# Altium PCB InclinometerPCB.PcbDoc
Units mm, origin at the board's own origin, x right, y up, seen from the top; angles counter-clockwise.
Board outline 73.32 x 51.32 mm, 2 copper layers (Top Layer, Bottom Layer), stack 1.586 mm thick; 64 components, 61 nets, 230 pads, 38 vias.
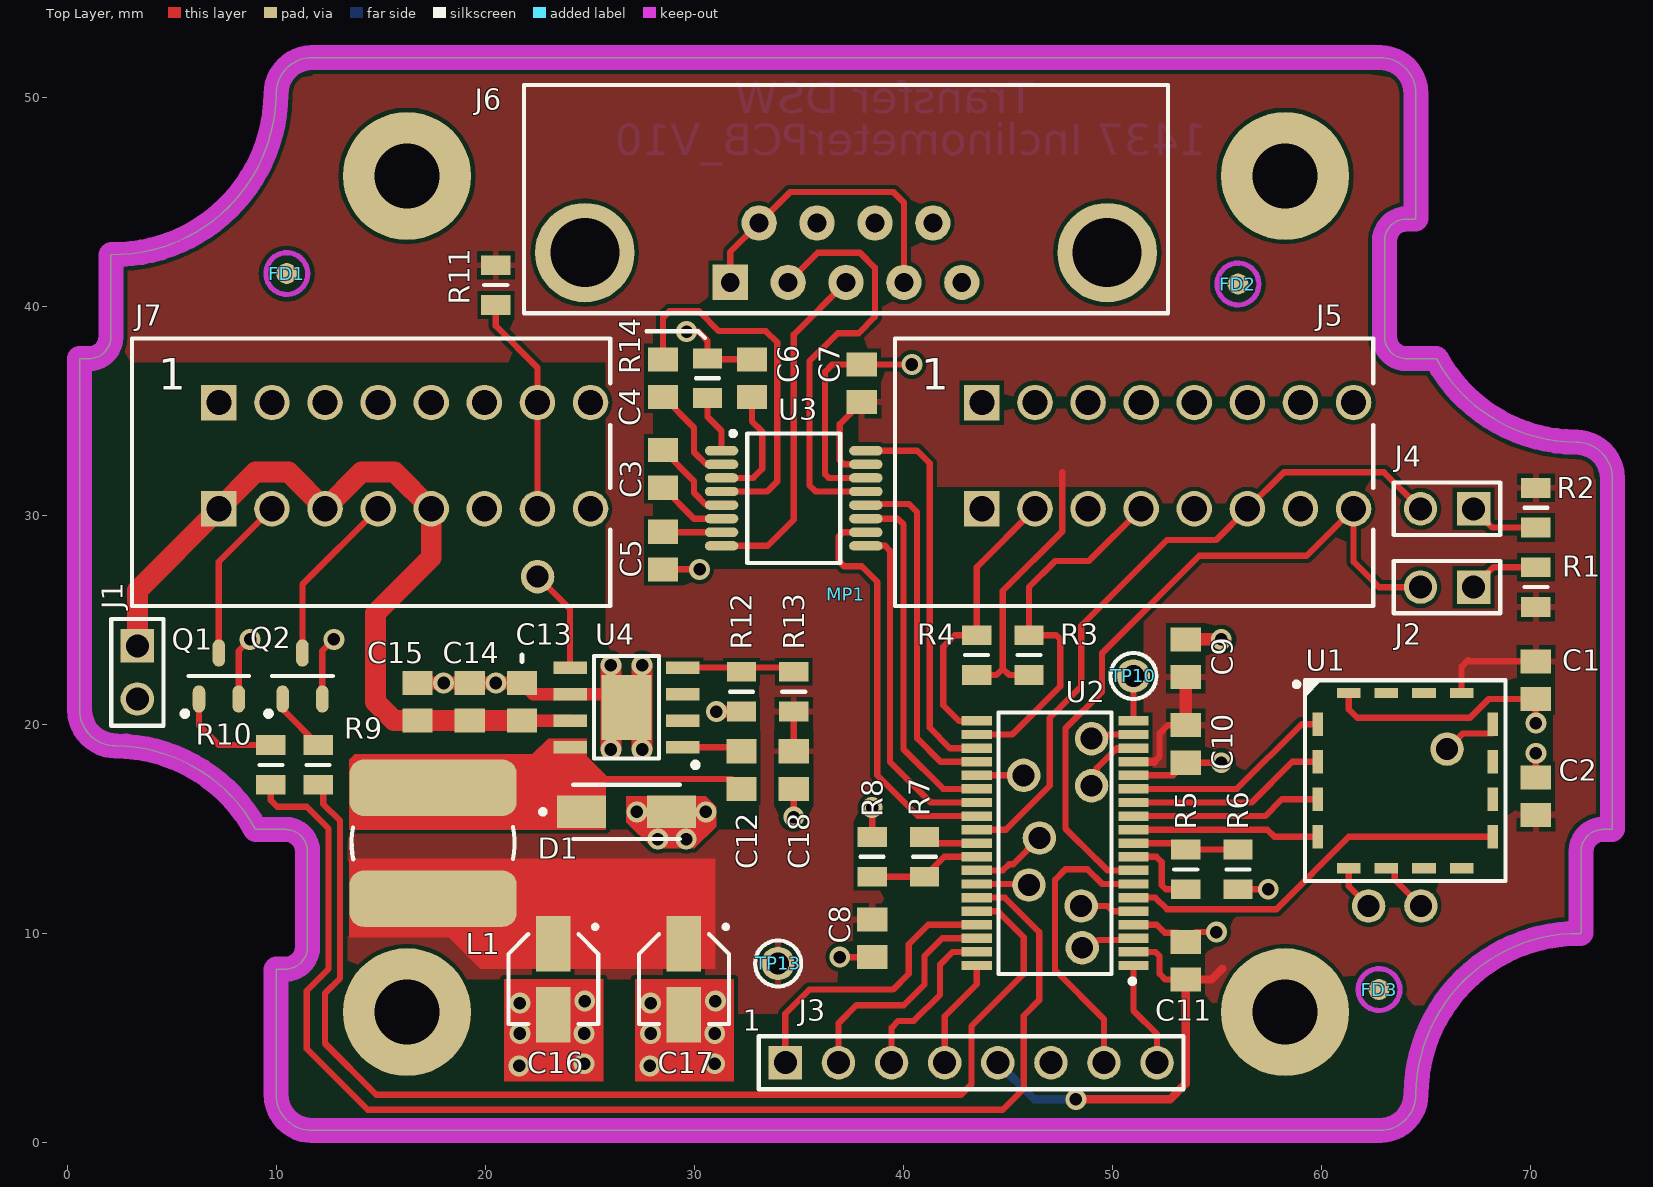
[diagram p0: Top Layer view]
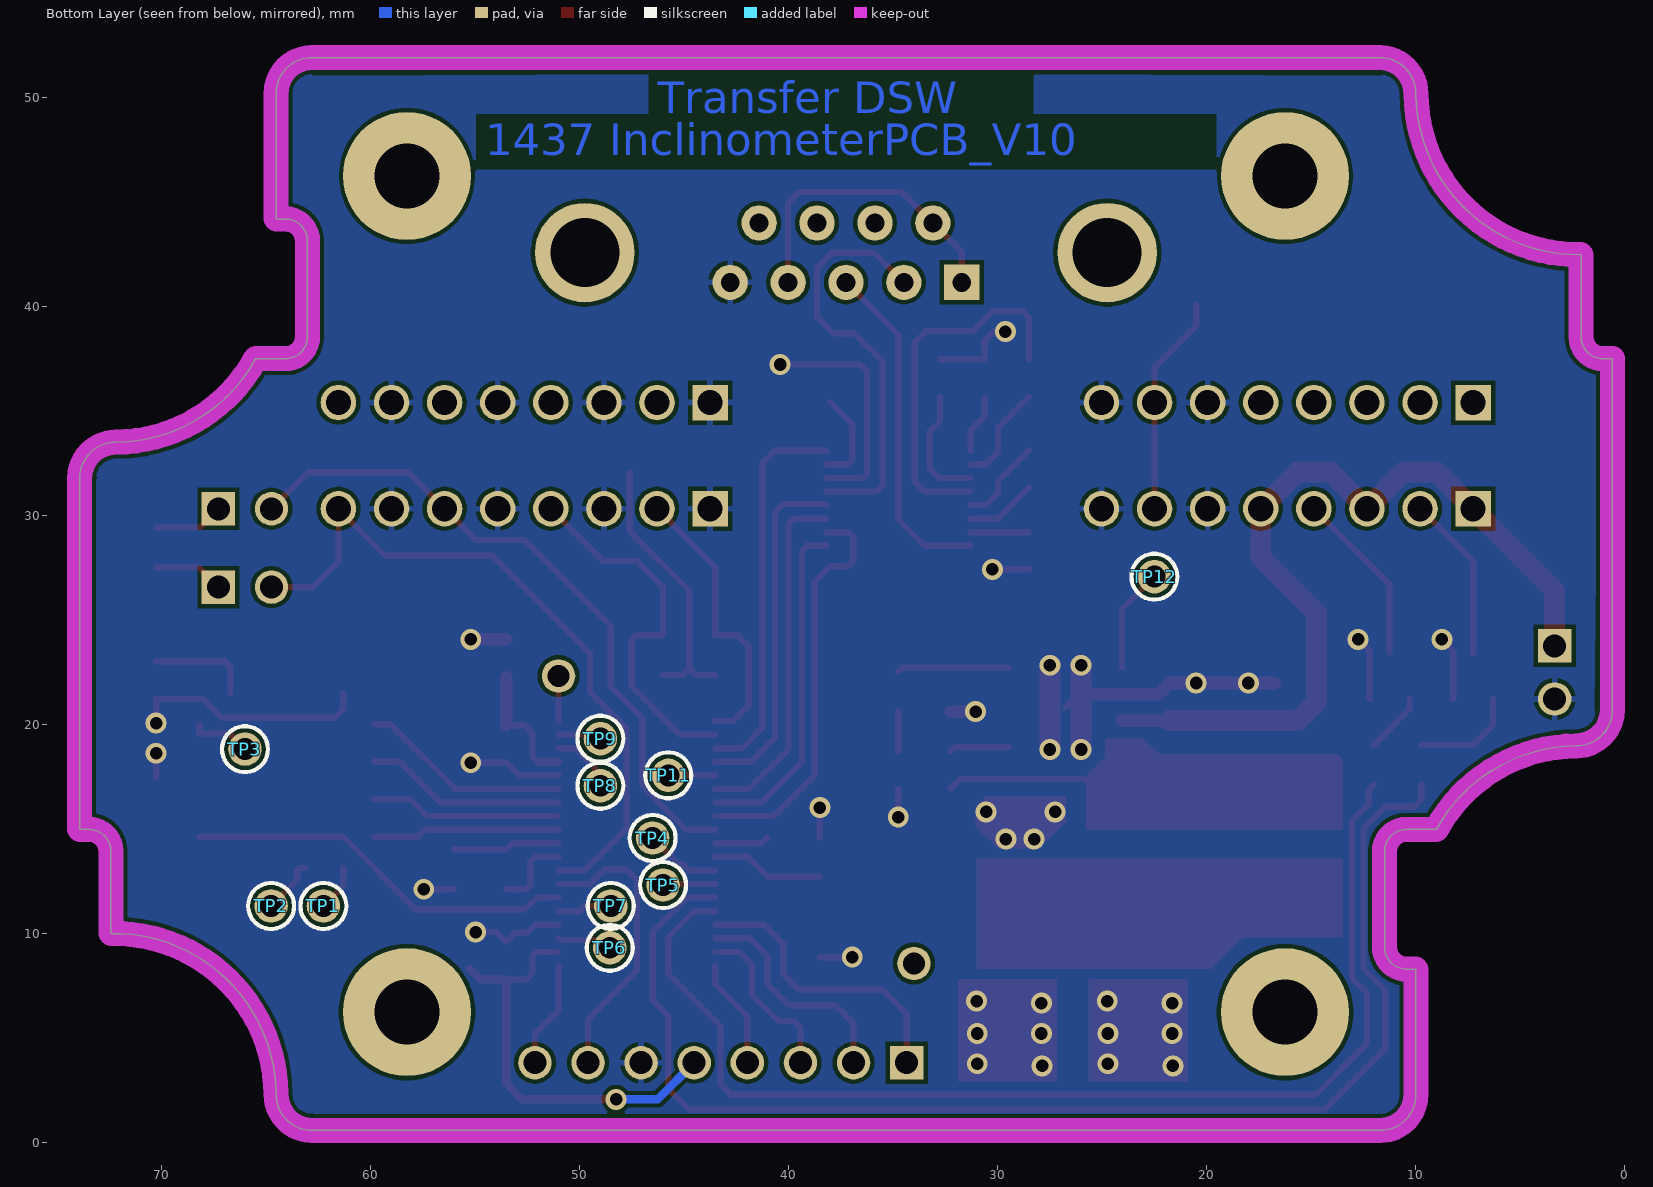
[diagram p1: Bottom Layer view, seen from below]
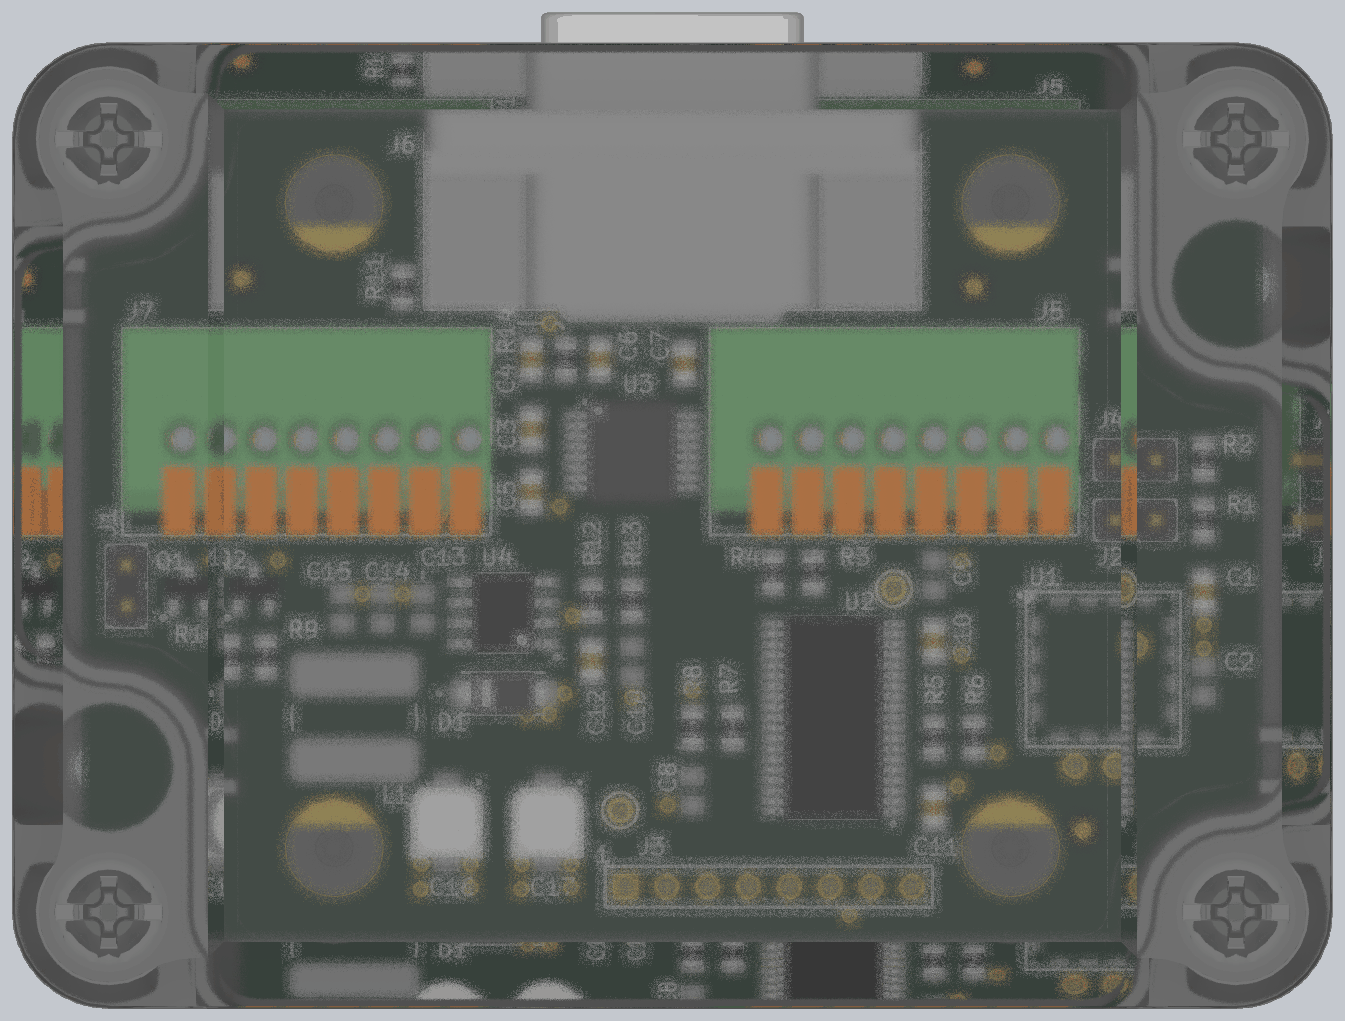
[diagram p2: 3D render of the assembled board from above, using the file's embedded part models]

## Layer stack, top to bottom
Top Solder: solder mask 0.0102, Solder Resist, Dk 3.5
Top Layer: signal copper 0.018
Dielectric1: core 1.55, FR-4, Dk 4.2
Bottom Layer: signal copper 0.018
Bottom Solder: solder mask 0.0102, Solder Resist, Dk 3.5

## Board outline
9.99,2.302 9.99,8.26 cw(c10.04,8.26) 10.04,8.31 10.44,8.31 ccw(c10.44,9.36) 11.49,9.36 11.49,13.94 ccw(c10.44,13.94) 10.44,14.99 9.043,14.99 cw(c9.043,15.04) 8.999,15.016 ccw(c2.261,11.285) 2.335,18.987 ccw(c2.32,20.717) 2.336,18.987 2.335,18.987 ccw(c2.261,11.285) 2.335,18.987 cw(c2.32,20.717) 0.59,20.701 cw(c0.64,20.702) 0.59,20.702 0.59,37.46 cw(c0.64,37.46) 0.64,37.51 1.04,37.51 ccw(c1.04,38.56) 2.09,38.56 2.09,42.438 cw(c2.14,42.438) 2.141,42.488 ccw(c2.226,50.249) 9.987,50.164 ccw(c2.226,50.249) 9.987,50.165 9.987,50.164 ccw(c11.717,50.18) 9.987,50.164 cw(c11.717,50.18) 11.701,51.91 cw(c11.702,51.86) 11.702,51.91 62.798,51.91 cw(c62.798,51.86) 62.799,51.91 cw(c62.798,50.198) 64.51,50.198 64.51,44.24 cw(c64.46,44.24) 64.46,44.19 64.06,44.19 ccw(c64.06,43.14) 63.01,43.14 63.01,38.56 ccw(c64.06,38.56) 64.06,37.51 65.457,37.51 cw(c65.457,37.46) 65.501,37.484 cw(c72.239,41.215) 65.501,37.484 ccw(c72.239,41.215) 72.165,33.513 ccw(c72.239,41.215) 72.165,33.513 ccw(c72.18,31.783) 72.164,33.513 72.165,33.513 cw(c72.18,31.783) 73.91,31.799 cw(c73.86,31.798) 73.91,31.798 73.91,15.04 cw(c73.86,15.04) 73.86,14.99 73.46,14.99 ccw(c73.46,13.94) 72.41,13.94 72.41,10.062 cw(c72.36,10.062) 72.359,10.012 ccw(c72.274,2.251) 64.513,2.336 ccw(c72.274,2.251) 64.513,2.335 64.513,2.336 cw(c62.783,2.32) 64.514,2.32 cw(c62.783,2.32) 62.799,0.59 cw(c62.798,0.64) 62.798,0.59 11.702,0.59 cw(c11.702,0.64) 11.701,0.59 cw(c11.702,2.302)

## Design rules (kind name [scope] priority, off if disabled: settings)
AcuteAngle [All] p1: minimum=8.00000000000000E+0001 checktracksonly=FALSE
Clearance Clearance_general [All] p1: gap=0.2 ignorepadtopadclearanceinfootprint=FALSE except(0: Arc-Hole Track-Hole SMDPad-Hole THPad-Hole Via-Hole Fill-Hole Poly-Hole Region-Hole Text-Hole)
Height [All] p1: minheight=0 maxheight=50 prefheight=12.7
HoleSize [All] p1: absolutevalues=TRUE maxlimit=5 minlimit=0.4 maxpercent=80.000 minpercent=20.000
MinimumAnnularRing [All] p1: minimumring=0.2
MinimumSolderMaskSliver [All] p1: minsoldermaskwidth=0.127
PlaneConnect PlaneConnect_VIAS [IsVia] p1: planeconnectstyle=Direct reliefexpansion=0.508 reliefentries=4 reliefconductorwidth=0.254 reliefairgap=0.254
PlaneConnect [All] p2: planeconnectstyle=Relief reliefexpansion=0.508 reliefentries=4 reliefconductorwidth=0.254 reliefairgap=0.254
PolygonConnect PolygonConnect_VIAS [IsVia] p1: connectstyle=Direct reliefconductorwidth=0.254 reliefentries=4 polygonreliefangle="90 Angle" airgapwidth=0.254
PolygonConnect [All] p2: connectstyle=Relief reliefconductorwidth=0.3 reliefentries=4 polygonreliefangle="90 Angle" airgapwidth=0.2
RoutingVias [All] p1: holewidth=0.6 width=1 viastyle="Through Hole" minholewidth=0.6 minwidth=1 maxholewidth=0.6 maxwidth=1
SMDNeckDown [All] p1: percent=100.000
SMDToCorner [All] p1: distance=39370
SilkToSilkClearance [All] p1: silktosilkclearance=0.2
SilkToSolderMaskClearance SilkscreenOverComponentPads [IsPad] p1: minsilkscreentomaskgap=0.2 clearancetoexposedcopper=TRUE
SolderMaskExpansion SolderMaskExpansion_via [isvia] p1: expansion=-0.2
SolderMaskExpansion [All] p2: expansion=0
Width Width_general [All] p1: maxlimit=2 minlimit=0.3 preferedwidth=0.3 checkconnectedcopper=TRUE // general nets rule
24 further rules are at their usual default settings.

## Components (designator, comment, footprint, x,y, rotation, side; value= is the part's Value field where it differs from the comment)
C1 "CAP" CAPC2012X88N 70.25,22.13 r90 top
C2 "CAP" CAPC2012X125N 70.25,16.58 r270 top
C3 "CAP" CAPC2012X88N 28.5,32.235 r270 top
C4 "CAP" CAPC2012X88N 28.5,36.58 r270 top
C5 "CAP" CAPC2012X88N 28.5,28.33 r90 top
C6 "CAP" CAPC2012X88N 32.75,36.58 r90 top
C7 "CAP" CAPC2012X88N 38,36.33 r270 top
C8 "CAP" CAPC2012X125N 38.5,9.78 r90 top
C9 "CAP" CAPC2012X125N 53.5,23.18 r270 top
C10 "CAP" CAPC2012X88N 53.5,19.08 r90 top
C11 "CAP" CAPC2012X88N 53.5,8.712 r270 top
C12 "CAP" CAPC2012X88N 32.25,17.83 r270 top
C13 "CAP" CAPC2012X125N 21.75,21.095 r270 top
C14 "CAP" CAPC2012X125N 19.25,21.095 r270 top
C15 "CAP" CAPC2012X125N 16.75,21.095 r270 top
C16 "CAP_POL" CAPAE430X560N 23.25,7.83 r270 top
C17 "CAP_POL" CAPAE430X560N 29.5,7.83 r270 top
C18 "CAP" CAPC2012X125N 34.75,17.83 r90 top
D1 "DIO_SCHOTTKY" DIOM5226X230N 26.75,15.83 r0 top
FD1 "MSC_FD" FID100X200 10.5,41.58 r0 top
FD2 "MSC_FD" FID100X200 56,41.08 r0 top
FD3 "MSC_FD" FID100X200 62.75,7.33 r0 top
J1 "CN_1X2M" HDRV2W64P254_1X2_508X254X854P 3.35,22.5 r270 top
J2 "CN_1X2M" HDRV2W64P254_1X2_508X254X854P 66,26.58 r180 top
J3 "CN_1X8M" "CN_WURTH_613 00811121" 34.35,3.83 r0 top
J4 "CN_1X2M" HDRV2W64P254_1X2_508X254X854P 66,30.33 r180 top
J5 "CN_1X8F" CN_WURTH_691403900008 43.75,30.33 r0 top
J6 "CN_1X9F" DB_RA_R-9 31.71,41.16 r180 top
J7 "CN_1X8F" CN_WURTH_691403900008 7.25,30.33 r0 top
L1 "IND_CORE" IND_BOURNS_SDR0805 17.5,14.33 r270 top
MP1 "MCH_MECHGENERIC" MCH_BOPLA_EM207 37.25,26.25 r270 top locked
Q1 "TRS_FETN_123" SOT95P237X112-3N 7.25,22.33 r90 top
Q2 "TRS_FETN_123" SOT95P237X112-3N 11.25,22.33 r90 top
R1 "RES" RESC2012X60N 70.25,26.58 r90 top
R2 "RES" RESC2012X60N 70.25,30.38 r270 top
R3 "RES" RESC2012X60N 46,23.33 r90 top
R4 "RES" RESC2012X60N 43.5,23.33 r90 top
R5 "RES" RESC2012X60N 53.5,13.08 r90 top
R6 "RES" RESC2012X60N 56,13.08 r270 top
R7 "RES" RESC2012X60N 41,13.68 r270 top
R8 "RES" RESC2012X60N 38.5,13.68 r90 top
R9 "RES" RESC2012X60N 12,18.08 r270 top
R10 "RES" RESC2012X60N 9.738,18.08 r270 top
R11 "RES" RESC2012X60N 20.5,41.03 r270 top
R12 "RES" RESC2012X60N 32.25,21.58 r270 top
R13 "RES" RESC2012X60N 34.75,21.58 r90 top
R14 "RES" RESC2012X60N 30.625,36.575 r90 top
TP1 "MSC_TP" MSC_TP_THT1MM 62.25,11.33 r180 bottom
TP2 "MSC_TP" MSC_TP_THT1MM 64.75,11.33 r180 bottom
TP3 "MSC_TP" MSC_TP_THT1MM 66,18.83 r180 bottom
TP4 "MSC_TP" MSC_TP_THT1MM 46.5,14.58 r180 bottom
TP5 "MSC_TP" MSC_TP_THT1MM 46,12.33 r180 bottom
TP6 "MSC_TP" MSC_TP_THT1MM 48.55,9.33 r180 bottom
TP7 "MSC_TP" MSC_TP_THT1MM 48.5,11.33 r180 bottom
TP8 "MSC_TP" MSC_TP_THT1MM 49,17.08 r90 bottom
TP9 "MSC_TP" MSC_TP_THT1MM 49,19.33 r90 bottom
TP10 "MSC_TP" MSC_TP_THT1MM 51,22.33 r90 top
TP11 "MSC_TP" MSC_TP_THT1MM 45.75,17.58 r90 bottom
TP12 "MSC_TP" MSC_TP_THT1MM 22.5,27.08 r90 bottom
TP13 "MSC_TP" MSC_TP_THT1MM 34,8.58 r90 top
U1 "IC_ANALOG_ADIS16209" IC_ANALOG_ADIS16209 64,17.33 r0 top
U2 "IC_TI-MSP430F22X4-DA38" SOP65P810X120-38N 47.25,14.33 r180 top
U3 "IC_TI_TRSF3221E" SOP65P780X200-16L 34.75,30.83 r0 top
U4 "IC_TI_LM22674MR" SOIC127P600X168-9N 26.75,20.83 r180 top

## Footprints (in the part's own frame and the unit in brackets; to place one, negate y for a bottom-side part, rotate by r counter-clockwise, add the part's x,y. Pads: shape width x height; smd on the part's side, far side on the other; paste and mask are expansions set on the pad)
CAPAE430X560N [mm]
  rect 2.65x1.65 smd: 1(-1.7,0) 2(1.7,0)
  silkscreen extent -2.6,-2.15 2.15,2.15, body extent -2.82,-2.15 2.82,2.17, height 5.52
CAPC2012X88N [mm]
  rect 1.15x1.45 smd: 1(-0.9,0) 2(0.9,0)
  body extent -1,-0.62 1,0.63, height 1
CAPC2012X125N [mm]
  rect 1.15x1.45 smd: 1(-0.9,0) 2(0.9,0)
  body extent -1,-0.62 1,0.62, height 1.25
"CN_WURTH_613 00811121" [mm]
  rect 1.6x1.6 hole 1.1: 1(0,0)
  round 1.6 hole 1.1: 2(2.54,0) 3(5.08,0) 4(7.62,0) 5(10.16,0) 6(12.7,0) 7(15.24,0) 8(17.78,0)
  silkscreen extent -1.27,-1.27 19.05,1.27
CN_WURTH_691403900008 [mm]
  rect 1.7x1.7 hole 1.2: 1(0,0) 1(0,5.08)
  round 1.7 hole 1.2: 2(2.54,0) 2(2.54,5.08) 3(5.08,0) 3(5.08,5.08) 4(7.62,0) 4(7.62,5.08) 5(10.16,0) 5(10.16,5.08) 6(12.7,0) 6(12.7,5.08) 7(15.24,0) 7(15.24,5.08) 8(17.78,0) 8(17.78,5.08)
  silkscreen extent -4.15,-4.65 18.72,8.15, body extent -4.14,-4.65 18.72,8.15, height 13.6
DB_RA_R-9 [mm]
  rect 1.69x1.69 hole 0.9 mask+0: 1(0,0)
  round 1.69 hole 0.9: 2(-2.77,0) 3(-5.54,0) 4(-8.31,0) 5(-11.08,0) 6(-1.385,-2.84) 7(-4.155,-2.84) 8(-6.925,-2.84) 9(-9.695,-2.84)
  round 4.76 hole 3.3: MH(-18.035,-1.42) MH(6.955,-1.42)
  silkscreen extent -20.94,-9.44 9.86,1.48, body extent -20.95,-16.94 9.86,2.26, height 12.52
DIOM5226X230N [mm]
  rect 2.35x1.55 smd: 1(-2.15,0) 2(2.15,0)
  silkscreen extent -4.1,-1.3 2.55,1.3, body extent -2.6,-1.3 2.6,1.3, height 2.05
FID100X200 [mm] "Fiducial pad 1.0mm Soldermask 2.0mm"
  round 1 smd paste-1 mask+0.5: ""(0,0)
  Top Layer keep-out circle w0.25: c0,0 r1
HDRV2W64P254_1X2_508X254X854P [mm]
  rect 1.6x1.6 hole 1.1: 1(-1.27,0)
  round 1.6 hole 1.1: 2(1.27,0)
  silkscreen extent -2.55,-1.25 2.55,1.25, body extent -2.55,-1.27 2.53,1.27, height 8.54
IC_ANALOG_ADIS16209 [mm] "High Accuracy, Dual-Axis Digital Inclinometer and Accelerometer"
  rect 0.5x1.127 smd: 1(-4.186,2.695) 2(-4.186,0.898) 3(-4.186,-0.899) 4(-4.186,-2.696) 9(4.186,-2.695) 10(4.186,-0.898) 11(4.186,0.899) 12(4.186,2.696)
  rect 1.127x0.5 smd: 5(-2.695,-4.186) 6(-0.898,-4.186) 7(0.899,-4.186) 8(2.696,-4.186) 13(2.695,4.186) 14(0.898,4.186) 15(-0.899,4.186) 16(-2.696,4.186)
  silkscreen extent -5.3,-4.8 4.8,4.8, body extent -4.6,-4.6 4.6,4.6, height 3.9
IND_BOURNS_SDR0805 [mm]
  rrect50% 2.7x8 smd: 1(-2.65,0) 2(2.65,0)
  Top Layer region: 2.625,4 1.3,4 1.3,-4 2.625,-4
  Top Layer region: -2.625,-4 -1.3,-4 -1.3,4 -2.625,4
  silkscreen extent -0.77,-3.9 0.77,3.9, body extent -3.9,-3.9 3.9,3.9, height 5.3
MCH_BOPLA_EM207 [mm]
  body extent -30,-41 30,41, height 48
MSC_TP_THT1MM [mm]
  round 1.6 hole 1.05: 1(0,0)
  silkscreen extent -1.1,-1.1 1.1,1.1
RESC2012X60N [mm]
  rect 0.95x1.4 smd: 1(-0.95,0) 2(0.95,0)
  silkscreen extent 0,-0.55 0,0.55, body extent -1,-0.62 1,0.63, height 0.6
SOIC127P600X168-9N [mm]
  rect 1.6x0.6 smd: 1(-2.7,1.905) 2(-2.7,0.635) 3(-2.7,-0.635) 4(-2.7,-1.905) 5(2.7,-1.905) 6(2.7,-0.635) 7(2.7,0.635) 8(2.7,1.905)
  rect 2.4x3.1 smd: 9(0,0)
  silkscreen extent -3.42,-2.45 1.55,2.87, body extent -3,-2.45 3,2.45, height 1.75
SOP65P780X200-16L [mm]
  oval 1.6x0.45 smd: 1(-3.45,2.275) 2(-3.45,1.625) 3(-3.45,0.975) 4(-3.45,0.325) 5(-3.45,-0.325) 6(-3.45,-0.975) 7(-3.45,-1.625) 8(-3.45,-2.275) 9(3.45,-2.275) 10(3.45,-1.625) 11(3.45,-0.975) 12(3.45,-0.325) 13(3.45,0.325) 14(3.45,0.975) 15(3.45,1.625) 16(3.45,2.275)
  silkscreen extent -3,-3.1 2.22,3.2, body extent -3.93,-3.25 3.93,3.25, height 2.02
SOP65P810X120-38N [mm]
  rect 1.45x0.45 smd: 1(-3.75,5.85) 2(-3.75,5.2) 3(-3.75,4.55) 4(-3.75,3.9) 5(-3.75,3.25) 6(-3.75,2.6) 7(-3.75,1.95) 8(-3.75,1.3) 9(-3.75,0.65) 10(-3.75,0) 11(-3.75,-0.65) 12(-3.75,-1.3) 13(-3.75,-1.95) 14(-3.75,-2.6) 15(-3.75,-3.25) 16(-3.75,-3.9) 17(-3.75,-4.55) 18(-3.75,-5.2) 19(-3.75,-5.85) 20(3.75,-5.85) 21(3.75,-5.2) 22(3.75,-4.55) 23(3.75,-3.9) 24(3.75,-3.25) 25(3.75,-2.6) 26(3.75,-1.95) 27(3.75,-1.3) 28(3.75,-0.65) 29(3.75,0) 30(3.75,0.65) 31(3.75,1.3) 32(3.75,1.95) 33(3.75,2.6) 34(3.75,3.25) 35(3.75,3.9) 36(3.75,4.55) 37(3.75,5.2) 38(3.75,5.85)
  silkscreen extent -3.8,-6.25 2.7,6.7, body extent -4.05,-6.3 4.05,6.3, height 1.02
SOT95P237X112-3N [mm]
  oval 1.3x0.6 smd: 1(-1.1,0.95) 2(-1.1,-0.95) 3(1.1,0)
  silkscreen extent -1.92,-1.45 0,1.75, body extent -1.32,-1.5 1.32,1.5, height 1.08

## Part data
C1 C3 C4 C5 C6 C7 C10 C11: library part 01_00637, "X7R 10% 0805", Manufacturer=KEMET, Manufacturer PN=C0805C104K9RACTU, Supplier Part Number 1=80-C0805C104K9R, Value1=100n, Value2=6.3v, ComponentLink1Description=Datasheet, ComponentLink1URL=X:\01_Datasheets\CAP_KEMET_CxxxxCxxxXxRAC.pdf, ComponentLink2Description=ComponentVerificationSheet, ComponentLink2URL=X:\02_ComponentVerificationSheets\CAP_KEMET_CxxxxCxxxXxRAC_ComponentVerificationSheet.xlsx, DeviceType=capacitor, Id=01_00637, MountType=SMD, Status=2, SubType=ceramic, Supplier 1=Mouser
C2 C8 C9 C13 C14 C15 C18: library part 01_01396, "X7R 10% 0805", Manufacturer=KEMET, Manufacturer PN=C0805C105K5RACTU, Supplier Part Number 1=2118131, Value1=1u, Value2=50v, ComponentLink1Description=Datasheet, ComponentLink1URL=X:\01_Datasheets\CAP_KEMET_CxxxxCxxxXxRAC.pdf, ComponentLink2Description=ComponentVerificationSheet, ComponentLink2URL=X:\02_ComponentVerificationSheets\CAP_KEMET_CxxxxCxxxXxRAC_ComponentVerificationSheet.xlsx, DeviceType=capacitor, Id=01_01396, MountType=SMD, Status=2, SubType=ceramic, Supplier 1=Farnell
C12: library part 01_00880, "X7R 10% 0805", Manufacturer=KEMET, Manufacturer PN=C0805C103K5RACTU, Supplier Part Number 1=1414662, Value1=10n, Value2=50v, ComponentLink1Description=Datasheet, ComponentLink1URL=X:\01_Datasheets\CAP_KEMET_CxxxxCxxxXxRAC.pdf, ComponentLink2Description=ComponentVerificationSheet, ComponentLink2URL=X:\02_ComponentVerificationSheets\CAP_KEMET_CxxxxCxxxXxRAC_ComponentVerificationSheet.xlsx, DeviceType=capacitor, Id=01_00880, MountType=SMD, Status=2, SubType=ceramic, Supplier 1=Farnell
C16 C17: library part 01_01399, "ALUMINUM ELECTROLYTIC CAPACITORS", Manufacturer=Nichicon, Manufacturer PN=UWF1C100MCL1GB, Supplier Part Number 1=647-UWF1C100MCL1GB, Value1=10u, Value2=16V, ComponentLink1Description=Datasheet, ComponentLink1URL=X:\01_Datasheets\CAP_NICHICON_UWF1C100MCL1GB.pdf, ComponentLink2Description=ComponentVerificationSheet, ComponentLink2URL=X:\02_ComponentVerificationSheets\CAP_NICHICON_UWF1C100MCL1GB_ComponentVerificationSheet.xlsx, DeviceType=capacitor, Id=01_01399, MountType=SMT, Status=0, Supplier 1=Mouser
D1: library part 03_00002, "DIODES INC. - B160-13-F - DIODE,SCHOTTKY, 60V, 1A, SMA", Manufacturer="DIODES INC", Manufacturer PN=B160-13-F, Supplier Part Number 1=1843674, Value1=B160, ComponentLink1Description=Datasheet, ComponentLink1URL=X:\01_Datasheets\DIO_DIODES_B160B.pdf, ComponentLink2Description=ComponentVerificationSheet, ComponentLink2URL=X:\02_ComponentVerificationSheets\DIO_DIODES_B160_ComponentVerificationSheet.xlsx, DeviceType=diode, Id=03_00002, MountType=SMT, Status=2, SubType=schottky, Supplier 1=Farnell
FD1 FD2 FD3: library part 12_00002, Value1=FIDUCIAL, Value2="NO BUY", ComponentLink1Description=Datasheet, ComponentLink1URL=X:\01_Datasheets\, ComponentLink2Description=ComponentVerificationSheet, ComponentLink2URL=X:\02_ComponentVerificationSheets\, DeviceType=misc, Id=12_00002, MountType=SMT, Status=0
J1 J2 J4: library part 02_00008, "2 pin male pin header Pitch2.54", Manufacturer="Wurth Electronics", Manufacturer PN=61300211121, Supplier Part Number 1=710-61300211121, ComponentLink1Description=Datasheet, ComponentLink1URL="X:\01_Datasheets\CN_WURTH_613 0xx 111 21.pdf", ComponentLink2Description=ComponentVerificationSheet, ComponentLink2URL="X:\02_ComponentVerificationSheets\CN_WURTH_613 0xx 111 21_ComponentVerificationSheet.xlsx", DeviceType=Connector_2, Id=02_00008, MountType=THT, Status=2, SubType=header, Supplier 1=Mouser, Value1=61300211121
J3: library part 02_00012, "2.54mm Pin Header WR-PHD", Manufacturer="Wurth Electronics", Manufacturer PN="613 00811121", Supplier Part Number 1=1841229, Value1="Header 8", ComponentLink1Description=Datasheet, ComponentLink1URL="X:\01_Datasheets\CN_WURTH_613 0xx 111 21.pdf", ComponentLink2Description=ComponentVerificationSheet, ComponentLink2URL=X:\02_ComponentVerificationSheets\CN_WURTH_61300811121_ComponentVerificationSheet.xlsx, DeviceType=Connector_8, Id=02_00012, MountType=THT, Status=2, Supplier 1=Farnell
J5 J7: library part 02_00011, "Serie 4039 B - 2.54mm m. vertikalem Kabeleingang - 0.5mm² Draht WR-TBL", Manufacturer="Wurth Electronics", Manufacturer PN=691403900008, Value1="691 403 900 008", ComponentLink1Description=Datasheet, ComponentLink1URL="X:\01_Datasheets\CN_WURTH_691 403 900 008.pdf", ComponentLink2Description=ComponentVerificationSheet, ComponentLink2URL=X:\02_ComponentVerificationSheets\CN_WURTH_691403900008_ComponentVerificationSheet.xlsx, DeviceType=Connector_8, Id=02_00011, MountType=SMT, Status=0, SubType="Terminal Block", Supplier 1=WURTH, Supplier Part Number 1=691403900008
J6: library part 02_00004, "Receptacle Through Hole Right Angle", Manufacturer=MULTICOMP, Manufacturer PN=5504F1-09S-02A-03, Supplier Part Number 1=1848372, Value1="SUB D9", Value2=Receptacle, ComponentLink1Description=Datasheet, ComponentLink1URL=CN_MULTI_5504F1-09S-02A-03.pdf, ComponentLink2Description=ComponentVerificationSheet, ComponentLink2URL=X:\02_ComponentVerificationSheets\CN_MULTI_5504F1-09S-02A-03_ComponentVerificationSheet.xlsx, DeviceType=Connector_9, Id=02_00004, MountType=THT, Status=1, Supplier 1=Farnell
L1: library part 08_00002, "BOURNS - SDR0805-680KL - INDUCTOR, SMD, 68UH, 1.3A", Manufacturer=Bourns, Manufacturer PN=SDR0805-680KL, Supplier Part Number 1=1828031, Value1=68u, Value2=850mA, ComponentLink1Description=Datasheet, ComponentLink1URL=X:\01_Datasheets\IND_BOURNS_SDR0805.pdf, ComponentLink2Description=ComponentVerificationSheet, ComponentLink2URL=X:\02_ComponentVerificationSheets\IND_BOURNS_SDR0805_ComponentVerificationSheet.xls, DeviceType=inductor, Id=08_00002, MountType=SMT, Status=2, SubType=power, Supplier 1=Farnell
MP1: library part 09_00002, "BOPLA - 63207400 - CASE, PLASTIC, EUROMAS 2", Manufacturer=BOPLA, Manufacturer PN=63207400, Supplier Part Number 1=1217465, Value1="EM 207F", ComponentLink1Description=Datasheet, ComponentLink1URL=X:\01_Datasheets\MCH_BOPLA_EM207F.pdf, ComponentLink2Description=ComponentVerificationSheet, ComponentLink2URL=X:\02_ComponentVerificationSheets\, DeviceType=Housing, Id=09_00002, Status=0, Supplier 1=Farnell
Q1 Q2: library part 19_00001, "INTERNATIONAL RECTIFIER - IRLML0040TRPBF - MOSFET & DIODE,N CH,40V,3.6A,SOT23", Manufacturer="INTERNATIONAL RECTIFIER", Manufacturer PN=IRLML0040TRPBF, Supplier Part Number 1=1831088, Value1=IRLML0040TRPbF, Value2="40v 3.6A", ComponentLink1Description=Datasheet, ComponentLink1URL=X:\01_Datasheets\TRS_IR_IRLML0040TRPbF.pdf, ComponentLink2Description=ComponentVerificationSheet, ComponentLink2URL=X:\02_ComponentVerificationSheets\TRS_IR_IRLML0040TRPbF_ComponentVerificationSheet.xlsx, DeviceType=transistor, Id=19_00001, MountType=SMT, Status=2, SubType="FET N", Supplier 1=Farnell
R1 R2 R3 R4: library part 15_00320, "1% SMT Resistor 0805", Manufacturer=YAGEO, Manufacturer PN=RC0805FR-07180R, Supplier Part Number 1=9237399, Value1=180R, Value2=0.125w, ComponentLink1Description=Datasheet, ComponentLink1URL=X:\01_Datasheets\RES_YAGEO_RC0805FR.pdf, ComponentLink2Description=ComponentVerificationSheet, ComponentLink2URL=X:\02_ComponentVerificationSheets\RES_YAGEO_RC0805FR_ComponentVerificationSheet.xlsx, DeviceType=resistor, Id=15_00320, MountType=SMD, Status=2, SubType=Film, Supplier 1=Farnell
R5 R7: library part 15_00360, "1% SMT Resistor 0805", Manufacturer=YAGEO, Manufacturer PN=RC0805FR-07390K, Supplier Part Number 1=9237941, Value1=390K, Value2=0.125w, ComponentLink1Description=Datasheet, ComponentLink1URL=X:\01_Datasheets\RES_YAGEO_RC0805FR.pdf, ComponentLink2Description=ComponentVerificationSheet, ComponentLink2URL=X:\02_ComponentVerificationSheets\RES_YAGEO_RC0805FR_ComponentVerificationSheet.xlsx, DeviceType=resistor, Id=15_00360, MountType=SMD, Status=2, SubType=Film, Supplier 1=Farnell
R6 R8 R12 R14: library part 15_00329, "1% SMT Resistor 0805", Manufacturer=YAGEO, Manufacturer PN=RC0805FR-071K, Supplier Part Number 1=9237496, Value1=1K, Value2=0.125w, ComponentLink1Description=Datasheet, ComponentLink1URL=X:\01_Datasheets\RES_YAGEO_RC0805FR.pdf, ComponentLink2Description=ComponentVerificationSheet, ComponentLink2URL=X:\02_ComponentVerificationSheets\RES_YAGEO_RC0805FR_ComponentVerificationSheet.xlsx, DeviceType=resistor, Id=15_00329, MountType=SMD, Status=2, SubType=Film, Supplier 1=Farnell
R9 R10: library part 15_00310, "1% SMT Resistor 0805", Manufacturer=YAGEO, Manufacturer PN=RC0805FR-0727R, Supplier Part Number 1=9237291, Value1=27R, Value2=0.125w, ComponentLink1Description=Datasheet, ComponentLink1URL=X:\01_Datasheets\RES_YAGEO_RC0805FR.pdf, ComponentLink2Description=ComponentVerificationSheet, ComponentLink2URL=X:\02_ComponentVerificationSheets\RES_YAGEO_RC0805FR_ComponentVerificationSheet.xlsx, DeviceType=resistor, Id=15_00310, MountType=SMD, Status=2, SubType=Film, Supplier 1=Farnell
R11: library part 15_00293, "1% SMT Resistor 0805", Manufacturer=YAGEO, Manufacturer PN=RC0805FR-071R, Supplier Part Number 1=9237135, Value1=1R, Value2=0.125w, ComponentLink1Description=Datasheet, ComponentLink1URL=X:\01_Datasheets\RES_YAGEO_RC0805FR.pdf, ComponentLink2Description=ComponentVerificationSheet, ComponentLink2URL=X:\02_ComponentVerificationSheets\RES_YAGEO_RC0805FR_ComponentVerificationSheet.xlsx, DeviceType=resistor, Id=15_00293, MountType=SMD, Status=0, SubType=Film, Supplier 1=Farnell
R13: library part 15_00439, "PANASONIC - ERJ-6ENF1581V - RESISTOR, THICK FILM, 1.58KOHM, 125mW, ± 1%", Manufacturer=PANASONIC, Manufacturer PN=ERJ-6ENF1581V, Supplier Part Number 1=2283260, Value1=1K58, Value2=0.125W, ComponentLink1Description=Datasheet, ComponentLink1URL=X:\01_Datasheets\RES_PANASONIC_ERJ.pdf, ComponentLink2Description=ComponentVerificationSheet, ComponentLink2URL=X:\02_ComponentVerificationSheets\RES_PANASONIC_ERJ_ComponentVerificationSheet.xlsx, DeviceType=resistor, Id=15_00439, MountType=SMT, Status=2, Supplier 1=Farnell
TP1 TP2 TP3 TP4 TP5 TP6 TP7 TP8 TP9 TP10 TP11 TP12 TP13: library part 12_00001, "With Hole for 1 header pin", Value1=TESTPOINT, Value2="NO BUY", ComponentLink1Description=Datasheet, ComponentLink1URL=X:\01_Datasheets\, ComponentLink2Description=ComponentVerificationSheet, ComponentLink2URL=X:\02_ComponentVerificationSheets\, Id=12_00001, MountType=THT, Status=0
U1: library part 07_00012, "High Accuracy, Dual-Axis Digital Inclinometer and Accelerometer", Manufacturer="Analog devices", Manufacturer PN=ADIS16209CCCZ, Supplier Part Number 1=1607244, Value1=ADIS16209, ComponentLink1Description=Datasheet, ComponentLink1URL=X:\01_DataSheets\IC_ANALOG_ADIS16209.pdf, ComponentLink2Description=ComponentVerificationSheet, ComponentLink2URL=X:\02_ComponentVerificationSheets\IC_ANALOG_ADIS16209_ComponentVerificationSheet.xlsx, DeviceType=ADIS16209, Id=07_00012, MountType=SMD, Status=2, SubType=Sensor, Supplier 1=Farnell
U2: library part 07_00011, "TEXAS INSTRUMENTS - MSP430F2254IDA - IC, MCU, 16BIT, 16K FLASH, 38TSSOP", Manufacturer=TI, Manufacturer PN=MSP430F2254IDA, Supplier Part Number 1=1649422, Value1=MSP430F2254, ComponentLink1Description=Datasheet, ComponentLink1URL=X:\01_DataSheets\IC_TI_MSP430F22x4.pdf, ComponentLink2Description=ComponentVerificationSheet, ComponentLink2URL=X:\02_ComponentVerificationSheets\IC_TI_MSP430F2254_ComponentVerificationSheet.xlsx, DeviceType=MSP430F2254IDA, Id=07_00011, MountType=SMD, Status=2, SubType=Microcontroller, Supplier 1=Farnell
U3: library part 07_00013, "3-V TO 5.5-V SINGLE-CHANNEL RS-232 1-Mbit/s LINE DRIVER/RECEIVER", Manufacturer=TI, Manufacturer PN=TRSF3221ECDB, Supplier Part Number 1=1755598, Value1=TRSF3221E, ComponentLink1Description=Datasheet, ComponentLink1URL=X:\01_DataSheets\IC_TI_TRSF3221E.pdf, ComponentLink2Description=ComponentVerificationSheet, ComponentLink2URL=X:\02_ComponentVerificationSheets\IC_TI_TRSF3221E_ComponentVerificationSheet.xlsx, DeviceType=TRSF3221ECDB, Id=07_00013, MountType=SMD, Status=2, SubType="level shifter", Supplier 1=Farnell
U4: library part 07_00014, "TEXAS INSTRUMENTS - LM22674MR-ADJ - REGULATOR, ADJ. VOLTAGE, 0.5A 8PSOP", Manufacturer=TI, Manufacturer PN=LM22674MR-ADJ, Supplier Part Number 1=1657737, Value1=LM22674, ComponentLink1Description=Datasheet, ComponentLink1URL=X:\01_Datasheets\IC_TI_LM22674.pdf, ComponentLink2Description=ComponentVerificationSheet, ComponentLink2URL=X:\02_ComponentVerificationSheets\IC_TI_LM22674_ComponentVerificationSheet.xlsx, DeviceType=LM22674, Id=07_00014, MountType=SMT, Status=2, SubType=SMPS, Supplier 1=Farnell

## Free pads (board coordinates)
  round 6.122 hole 3.1: 1(16.25,6.25) 1(16.25,46.25) 1(58.25,6.25) 1(58.25,46.25)

## Via types
v1: diameter 1, hole 0.6, Top Layer to Bottom Layer, 38 vias

## Nets (pads, with @x,y where several pads share a name; then routed paths per layer and width w, separated by ;. In a path a pad name is that pad's centre, name@x,y a point inside that pad or via, vN(x,y) a via of type N, cw(c..) or ccw(c..) an arc to the next point about the centre after c; other vN are vias at no path point)
3V3: C1.2 C2.2 C7.2 C8.2 C9.2 C10.2 C11.2 C16.1 C17.1 C18.2 J3.5 L1.2 R1.1 R2.1 R3.1 R4.1 R11.1 R13.1 TP13.1 U1.13 U2.2 U2.16 U3.15 | length 51.4
  Top Layer w0.3: C18.2 R13.1 ; C7.2 36.95,34.38 36.95,32.655 37.15,32.455 U3.15 ; R4.1 44.454,22.38 44.75,22.676 ; R3.1 45.046,22.38 44.75,22.676 ; 47.589,32.08 47.589,29.241 44.75,26.401 44.75,22.676 ; U2.2 52.05,9.13 52.25,8.93 52.25,8.08 52.517,7.812 C11.2 ; 52.001,18.23 52.25,18.478 52.25,19.58 52.65,19.98 C10.2 ; U1.13 66.695,22.775 67,23.08 67.05,23.03 C1.2
  Top Layer w0.4: v1(48.25,2.08) 52.75,2.08 53.5,2.83 C11.2 54.733,7.812 55.25,8.33 ; U2.16 52.001,18.23
  Top Layer w0.6: C10.2 C9.2
  Bottom Layer w0.4: J3.5 46.26,2.08 v1(48.25,2.08)
24V: C13.2 C14.2 C15.2 J1.1 J7.1 J7.3 J7.5 U4.7 | length 41.3
  Top Layer w0.6: C13.2 U4.7
  Top Layer w1: J1.1 3.35,26.43 7.25,30.33 9,32.08 10.58,32.08 12.33,30.33 14.08,32.08 15.66,32.08 17.41,30.33 17.41,27.99 14.75,25.33 14.75,21.08 15.635,20.195 C15.2 C14.2 C13.2
232_RXD: J6.3 U3.8 | length 16.4
  Top Layer w0.3: U3.8 33.5,28.555 34.75,29.805 34.75,38.66 J6.3
232_TXD: J6.2 U3.13 | length 20.8
  Top Layer w0.3: J6.2@34.48,40.566 J6.2 35.9,42.58 37.92,42.58 38.635,41.865 38.635,39.515 37.85,38.73 36.85,38.73 35.5,37.38 35.5,31.451 35.797,31.155 U3.13
EXT_BUZZER: J7.4 Q2.3 | length 8.4
  Top Layer w0.3: Q2.3 11.25,26.71 J7.4@14.87,30.33
EXT_LAMP: J7.2 Q1.3 | length 8
  Top Layer w0.3: Q1.3 7.25,27.79 J7.2@9.79,30.33
FORCEON: U2.23 U3.12 | length 16.8
  Top Layer w0.3: U3.12 38.257,30.562 40.25,30.562 40.65,30.162 40.65,19.35 41.77,18.23 U2.23
GND: C1.1 C2.1 C5.1 C6.2 C7.1 C8.1 C9.1 C10.1 C11.1 C13.1 C14.1 C15.1 C16.2 C17.2 C18.1 D1.2 J1.2 J3.6 J5.1 J5.3 J5.5 J5.7 J6.5 J7.6 J7.8 Q1.2 Q2.2 R6.2 R8.2 R12.2 R14.2 U1.16 U2.4 U2.15 U3.14 U4.6 U4.9 | length 72.1
  Top Layer w0.3: Q1.2 8.2,23.53 v1(8.75,24.08) ; Q2.2 12.2,23.53 v1(12.75,24.08) ; U4.9@26,21.465 26.115,21.465 U4.9 ; C5.1 v1(30.25,27.43) ; v1(29.625,38.8) 30.2,38.8 30.625,38.375 R14.2 30.67,37.48 C6.2 ; v1(34.75,15.58) C18.1 ; v1(36.953,8.88) C8.1 ; U3.14 36.43,31.805 36.25,31.985 36.25,36.89 36.59,37.23 C7.1 v1(40.4,37.23) ; R8.2@38.5,14.58 R8.2 v1(38.5,16.03) ; U2.4 52.116,10.43 52.502,10.044 53.068,10.044 C11.1 53.967,10.08 v1(54.967,10.08) ; U2.15 52.9,17.58 C10.1 v1(55.2,18.18) ; R6.2 v1(57.45,12.13) ; U1.16 61.304,20.73 61.704,20.33 67.1,20.33 68,21.23 C1.1 v1(70.25,20.077) ; C2.1 v1(70.25,18.632)
  Top Layer w0.6: C15.1 v1(18,21.995) C14.1 v1(20.5,21.995) C13.1 22.28,21.465 U4.6 U4.9@26,21.465 ; v1(31.05,20.63) R12.2 ; C9.1 v1(55.2,24.08)
  Top Layer w1: v1(26,18.815) 26,21.465 v1(26,22.845) ; v1(27.5,18.815) v1(27.5,22.845)
  other v1: 21.618,3.679 27.868,3.679 24.722,3.779 30.972,3.779 21.65,5.229 24.722,5.229 27.9,5.229 30.972,5.229 21.65,6.679 27.9,6.679 24.754,6.779 31.004,6.779 28.25,14.53 29.6,14.53 27.25,15.83 30.55,15.83
INC_NCS: U1.4 U2.11 | length 9
  Top Layer w0.3: U2.11 57.4,14.98 57.745,14.634 U1.4
INC_NRST: U1.9 U2.6 | length 18.9
  Top Layer w0.3: U2.6 52.05,11.73 52.607,11.172 57.842,11.172 61.304,14.634 U1.9
MISO: U1.2 U2.13 | length 9.6
  Top Layer w0.3: U2.13 56.65,16.28 58.598,18.228 U1.2
MOSI: U1.3 U2.12 | length 9.1
  Top Layer w0.3: U2.12 57.3,15.63 58.101,16.431 U1.3
NetC3_1: C3.1 U3.5 | length 4.2
  Top Layer w0.3: C3.1 29.98,31.655 29.98,31.086 30.562,30.505 U3.5
NetC3_2: C3.2 U3.6 | length 3.4
  Top Layer w0.3: C3.2 29.98,29.855 U3.6
NetC4_1: C4.1 U3.4 | length 17.7
  Top Layer w0.3: C4.1 28.5,39.475 28.8,39.775 30.225,39.775 31.17,38.83 33.42,38.83 33.955,38.295 33.955,31.635 33.475,31.155 U3.4
NetC4_2: C4.2 U3.2 | length 4.8
  Top Layer w0.3: C4.2 29.98,34.2 29.98,33.036 30.562,32.455 U3.2
NetC5_2: C5.2 U3.7 | length 2.8
  Top Layer w0.3: C5.2@28.5,29.205 U3.7
NetC6_1: C6.1 U3.3 | length 5.8
  Top Layer w0.3: U3.3 32.82,31.805 33.25,32.235 33.25,34.025 32.75,34.525 C6.1
NetC12_1: C12.1 U4.1 | length 2.9
  Top Layer w0.3: U4.1 32.055,18.925 C12.1
NetC12_2: C12.2 D1.1 L1.1 U4.8 | length 9
  Top Layer w0.3: D1.1 24.6,16.755 25.25,17.405 31.775,17.405 C12.2
NetJ2_1: J2.1 R1.2 | length 3.4
  Top Layer w0.3: J2.1 68.22,27.53 R1.2
NetJ4_1: J4.1 R2.2 | length 3.4
  Top Layer w0.3: J4.1 68.17,29.43 R2.2
NetJ6_1: J6.1 J6.4 J6.6 | length 15
  Top Layer w0.3: J6.1 31.71,42.615 J6.6 34.575,45.48 39.52,45.48 40.02,44.98 J6.4
NetJ7_7: J7.7 R11.2 | length 10.6
  Top Layer w0.3: R11.2 20.5,39.075 22.49,37.085 J7.7@22.49,30.33
NetQ1_1: Q1.1 R10.1 | length 5.1
  Top Layer w0.3: Q1.1 6.3,19.98 7.25,19.03 R10.1
NetQ2_1: Q2.1 R9.1 | length 2.9
  Top Layer w0.3: Q2.1 10.3,20.73 R9.1
NetR5_1: R5.1 U2.9 | length 3.8
  Top Layer w0.3: U2.9 52.1,13.68 52.35,13.43 52.35,12.33 52.55,12.13 R5.1
NetR5_2: R5.2 R6.1 U2.10 | length 5.1
  Top Layer w0.3: U2.10 53.2,14.33 R5.2 R6.1
NetR7_1: R7.1 U2.29 | length 2.6
  Top Layer w0.3: R7.1 41.3,14.33 U2.29
NetR7_2: R7.2 R8.1 U2.30 | length 5.4
  Top Layer w0.3: R8.1 R7.2 41.95,13.68 U2.30
NetR12_1: R12.1 R13.2 U4.4 | length 5.4
  Top Layer w0.3: U4.4 34.545,22.735 R13.2
NetR14_1: R14.1 U3.1 | length 2.8
  Top Layer w0.3: R14.1 30.625,34.725 31.3,34.05 U3.1
NetTP1_1: TP1.1 U1.5 | length 2.2
  Top Layer w0.3: U1.5 61.304,12.275 TP1.1
NetTP2_1: TP2.1 U1.6 | length 2.7
  Top Layer w0.3: U1.6 63.436,13.143 63.5,13.08 63.5,12.58 TP2.1
NetTP3_1: TP3.1 U1.12 | length 2.9
  Top Layer w0.3: TP3.1 66.75,19.58 68.186,19.58 U1.12
NetTP4_1: TP4.1 U2.31 | length 3.6
  Top Layer w0.3: U2.31 44.75,13.03 45.05,13.33 45.25,13.33 TP4.1
NetTP5_1: TP5.1 U2.32 | length 2.5
  Top Layer w0.3: U2.32 45.95,12.38 TP5.1
NetTP6_1: TP6.1 U2.3 | length 2.6
  Top Layer w0.3: TP6.1 48.95,9.33 49.325,9.705 50.925,9.705 U2.3
NetTP7_1: TP7.1 U2.5 | length 2.6
  Top Layer w0.3: TP7.1 49.75,11.33 50,11.08 U2.5
NetTP8_1: TP8.1 U2.17 | length 3.1
  Top Layer w0.3: TP8.1 49,17.33 49.25,17.58 49.25,17.925 50.205,18.88 50.25,18.88 ; 50.25,18.805 50.325,18.88 U2.17
NetTP9_1: TP9.1 U2.18 | length 2.1
  Top Layer w0.3: TP9.1 49.2,19.53 U2.18
NetTP10_1: TP10.1 U2.19 | length 2.2
  Top Layer w0.3: U2.19 TP10.1
NetTP11_1: TP11.1 U2.24 | length 2.3
  Top Layer w0.3: U2.24 TP11.1
NetTP12_1: TP12.1 U4.5 | length 5
  Top Layer w0.3: TP12.1 24.05,25.53 U4.5
NEXT_BUZZER: R9.2 U2.34 | length 56.1
  Top Layer w0.3: R9.2 12.25,16.88 12.25,16.205 13.05,15.405 13.05,7.88 12.33,7.16 12.33,4.75 14.778,2.302 42.75,2.302 43.25,2.802 43.25,5.58 45.75,8.08 45.75,9.83 44.5,11.08 U2.34
NEXT_LAMP: R10.2 U2.33 | length 62.5
  Top Layer w0.3: R10.2 9.738,16.382 10.04,16.08 11.45,16.08 12.5,15.03 12.5,8.33 11.45,7.28 11.45,4.5 14.37,1.58 44.75,1.58 45.75,2.58 45.75,6.08 46.5,6.83 46.5,10.08 44.85,11.73 U2.33
NFORCEOFF: U2.22 U3.16 | length 18.6
  Top Layer w0.3: U3.16 40.65,33.105 41.25,32.505 41.25,19.85 42.22,18.88 U2.22
NINVALID: U2.27 U3.10 | length 19.6
  Top Layer w0.3: U3.10 37.1,29.205 36.903,29.008 36.903,27.83 37.153,27.58 38,27.58 38.75,26.83 38.75,17.58 40.7,15.63 U2.27
RX: U2.26 U3.9 | length 16.3
  Top Layer w0.3: U3.9 39.125,28.555 39.35,28.33 39.35,18.23 41.3,16.28 U2.26
SBWTCK: J3.8 U2.1 | length 5.1
  Top Layer w0.3: U2.1 51,6.33 52.13,5.2 J3.8
SBWTDIO: J3.7 U2.7 | length 14
  Top Layer w0.3: J3.7 49.59,5.91 47.25,8.25 47.25,12.58 47.75,13.08 48.8,13.08 49.5,12.38 U2.7
SCLK: U1.1 U2.14 | length 10.1
  Top Layer w0.3: U2.14 55.95,16.93 59.045,20.025 U1.1
TCK: J3.1 U2.35 | length 14.1
  Top Layer w0.3: J3.1 34.35,6.18 35.5,7.33 39.5,7.33 40.25,8.08 40.25,9.499 41.181,10.43 U2.35
TDI: J3.3 U2.37 | length 8.1
  Top Layer w0.3: J3.3 39.43,5.51 39.75,5.83 40.5,5.83 41.75,7.08 41.75,8.53 42.35,9.13 U2.37
TDO: J3.4 U2.38 | length 5.3
  Top Layer w0.3: J3.4 41.97,6.05 43.5,7.58 U2.38
TEMP1: J2.2 J5.8 U2.8 | length 34.3
  Top Layer w0.3: U2.8 49.757,13.03 49.207,13.58 49.2,13.58 47.75,15.03 47.75,19.83 49.5,21.58 49.5,23.43 54.15,28.08 59.28,28.08 61.53,30.33 61.53,27.8 62.75,26.58 J2.2
TEMP2: J4.2 J5.6 U2.28 | length 32.6
  Top Layer w0.3: U2.28 44.9,14.98 47,17.08 47,20.33 48.5,21.83 48.5,24.73 52.6,28.83 54.95,28.83 56.45,30.33 58.2,32.08 62.98,32.08 J4.2
TEMP3: J5.4 R3.2 U2.21 | length 18
  Top Layer w0.3: U2.21 45.2,19.53 47.5,21.83 47.5,24.08 47.3,24.28 R3.2 46,26.58 47.25,27.83 48.87,27.83 J5.4@51.37,30.33
TEMP4: J5.2 R4.2 U2.20 | length 13.7
  Top Layer w0.3: U2.20 42.65,20.18 41.9,20.93 41.9,23.732 42.447,24.28 R4.2 43.5,27.54 J5.2@46.29,30.33
TMS: J3.2 U2.36 | length 11
  Top Layer w0.3: J3.2 36.89,5.72 37.75,6.58 40.011,6.58 41,7.569 41,8.931 41.848,9.78 U2.36
TX: U2.25 U3.11 | length 17
  Top Layer w0.3: U3.11 39.725,29.855 40,29.58 40,18.83 41.9,16.93 U2.25
pads on no net: FD1. FD2. FD3. J6.7 J6.8 J6.9 J6.MH U1.7 U1.8 U1.10 U1.11 U1.14 U1.15 U4.2 U4.3

## Polygon pours and split planes (outlines as drawn)
GND on Bottom Layer "Bottom Layer-GND" (solid, remove dead copper, pour order 4): 9.99,2.302 9.99,8.26 cw(c10.04,8.26) 10.04,8.31 10.44,8.31 ccw(c10.44,9.36) 11.49,9.36 11.49,13.94 ccw(c10.44,13.94) 10.44,14.99 9.043,14.99 cw(c9.043,15.04) 8.999,15.016 ccw(c2.261,11.285) 2.335,18.987 ccw(c2.314,20.723) 2.336,18.987 2.335,18.987 ccw(c2.259,11.275) 2.335,18.987 cw(c2.32,20.717) 0.59,20.701 cw(c0.64,20.702) 0.59,20.702 0.59,37.46 cw(c0.64,37.46) 0.64,37.51 1.04,37.51 ccw(c1.04,38.56) 2.09,38.56 2.09,42.438 cw(c2.14,42.438) 2.141,42.488 ccw(c2.226,50.249) 9.987,50.164 ccw(c2.261,50.244) 9.987,50.165 9.987,50.164 ccw(c11.718,50.181) 9.987,50.164 cw(c11.717,50.18) 11.701,51.91 cw(c11.702,51.86) 11.702,51.91 62.798,51.91 cw(c62.798,51.86) 62.799,51.91 cw(c62.798,50.198) 64.51,50.198 64.51,44.24 cw(c64.46,44.24) 64.46,44.19 64.06,44.19 ccw(c64.06,43.14) 63.01,43.14 63.01,38.56 ccw(c64.06,38.56) 64.06,37.51 65.457,37.51 cw(c65.457,37.46) 65.501,37.484 cw(c72.23,41.218) 65.501,37.484 ccw(c72.239,41.215) 72.165,33.513 ccw(c72.255,41.215) 72.165,33.513 ccw(c72.18,31.77) 72.164,33.513 72.165,33.513 cw(c72.18,31.783) 73.91,31.799 cw(c73.86,31.798) 73.91,31.798 73.91,15.04 cw(c73.86,15.04) 73.86,14.99 73.46,14.99 ccw(c73.46,13.94) 72.41,13.94 72.41,10.062 cw(c72.36,10.062) 72.359,10.012 ccw(c72.274,2.251) 64.513,2.336 ccw(c72.239,2.256) 64.513,2.335 64.513,2.336 cw(c62.783,2.32) 64.514,2.32 cw(c62.783,2.32) 62.799,0.59 cw(c62.798,0.64) 62.798,0.59 11.702,0.59 cw(c11.702,0.64) 11.701,0.59 cw(c11.702,2.302)
3V3 on Top Layer "Top Layer-3V3" (solid, remove dead copper, pour order 6): 9.99,2.302 9.99,8.26 cw(c10.04,8.26) 10.04,8.31 10.44,8.31 ccw(c10.44,9.36) 11.49,9.36 11.49,13.94 ccw(c10.44,13.94) 10.44,14.99 9.043,14.99 cw(c9.043,15.04) 8.999,15.016 ccw(c2.261,11.285) 2.335,18.987 ccw(c2.314,20.723) 2.336,18.987 2.335,18.987 ccw(c2.259,11.275) 2.335,18.987 cw(c2.32,20.717) 0.59,20.701 cw(c0.64,20.702) 0.59,20.702 0.59,37.46 cw(c0.64,37.46) 0.64,37.51 1.04,37.51 ccw(c1.04,38.56) 2.09,38.56 2.09,42.438 cw(c2.14,42.438) 2.141,42.488 ccw(c2.226,50.249) 9.987,50.164 ccw(c2.261,50.244) 9.987,50.165 9.987,50.164 ccw(c11.718,50.181) 9.987,50.164 cw(c11.717,50.18) 11.701,51.91 cw(c11.702,51.86) 11.702,51.91 62.798,51.91 cw(c62.798,51.86) 62.799,51.91 cw(c62.798,50.198) 64.51,50.198 64.51,44.24 cw(c64.46,44.24) 64.46,44.19 64.06,44.19 ccw(c64.06,43.14) 63.01,43.14 63.01,38.56 ccw(c64.06,38.56) 64.06,37.51 65.457,37.51 cw(c65.457,37.46) 65.501,37.484 cw(c72.23,41.218) 65.501,37.484 ccw(c72.239,41.215) 72.165,33.513 ccw(c72.255,41.215) 72.165,33.513 ccw(c72.18,31.77) 72.164,33.513 72.165,33.513 cw(c72.18,31.783) 73.91,31.799 cw(c73.86,31.798) 73.91,31.798 73.91,15.04 cw(c73.86,15.04) 73.86,14.99 73.46,14.99 ccw(c73.46,13.94) 72.41,13.94 72.41,10.062 cw(c72.36,10.062) 72.359,10.012 ccw(c72.274,2.251) 64.513,2.336 ccw(c72.239,2.256) 64.513,2.335 64.513,2.336 cw(c62.783,2.32) 64.514,2.32 cw(c62.783,2.32) 62.799,0.59 cw(c62.798,0.64) 62.798,0.59 11.702,0.59 cw(c11.702,0.64) 11.701,0.59 cw(c11.702,2.302)

## Keep-outs
Keep-Out Layer:
  lines w1.2: 0.59,20.716 0.59,37.51 1.04,37.51 ccw(c1.04,38.56) 2.09,38.56 2.09,42.438 cw(c2.14,42.438) 2.141,42.488 ccw(c2.226,50.249) 9.987,50.164 ; 0.59,37.46 cw(c0.64,37.46) 0.64,37.51 ; 0.591,20.7 ccw(c2.32,20.716) 2.335,18.987 cw(c2.261,11.285) 2.335,18.987 ; 11.702,0.59 cw(c11.702,0.64) 11.701,0.59 ; 2.335,18.987 ccw(c2.32,20.717) 2.336,18.987 ; 2.335,18.987 cw(c2.261,11.285) 8.999,15.016 ccw(c9.043,15.04) 9.043,14.99 10.44,14.99 cw(c10.44,13.94) 11.49,13.94 11.49,9.36 cw(c10.44,9.36) 10.44,8.31 10.04,8.31 ccw(c10.04,8.26) 9.99,8.26 9.99,2.302 ccw(c11.702,2.302) 11.701,0.59 ; 2.335,18.987 2.336,18.987 ; 9.987,50.164 cw(c11.717,50.18) 11.701,51.91 cw(c11.702,51.86) 11.702,51.91 62.798,51.91 cw(c62.798,51.86) 62.799,51.91 cw(c62.798,50.198) 64.51,50.198 64.51,44.24 cw(c64.46,44.24) 64.46,44.19 64.06,44.19 ccw(c64.06,43.14) 63.01,43.14 63.01,38.56 ccw(c64.06,38.56) 64.06,37.51 65.457,37.51 cw(c65.457,37.46) 65.501,37.484 ; 9.987,50.164 ccw(c11.717,50.18) 9.987,50.164 9.987,50.164 ; 9.987,50.164 ccw(c2.226,50.249) 9.987,50.165 ; 9.987,50.164 9.987,50.165 ; 11.701,0.59 62.798,0.59 ccw(c62.798,0.64) 62.799,0.59 ccw(c62.783,2.32) 64.514,2.32 ccw(c62.783,2.32) 64.513,2.336 ; 64.513,2.336 ccw(c72.274,2.251) 64.513,2.335 64.513,2.336 ; 64.513,2.336 cw(c72.274,2.251) 72.359,10.012 ccw(c72.36,10.062) 72.41,10.062 72.41,13.94 cw(c73.46,13.94) 73.46,14.99 73.86,14.99 ccw(c73.86,15.04) 73.91,15.04 73.91,31.798 ; 65.501,37.484 ccw(c72.239,41.215) 72.165,33.513 ; 65.501,37.484 ccw(c72.239,41.215) 65.501,37.484 ; 65.501,37.484 65.501,37.484 ; 65.501,37.484 65.501,37.484 ; 72.165,33.513 cw(c72.18,31.783) 73.91,31.799 ; 72.165,33.513 ccw(c72.18,31.783) 72.164,33.513 ; 72.165,33.513 ccw(c72.239,41.215) 72.165,33.513 72.165,33.513 ; 72.164,33.513 72.165,33.513 ; 73.91,31.798 ccw(c73.86,31.798) 73.91,31.799 ; 73.91,31.798 73.91,31.798 ; 0.59,20.702 ccw(c0.64,20.702) 0.59,20.701

## Other copper
Top Layer:
  region net GND: 25.65,2.929 25.65,7.829 20.9,7.829 20.9,2.929
  region net GND: 31.9,2.929 31.9,7.829 27.15,7.829 27.15,2.929
  pour cut-out: 59.2,22.13 71.08,22.13 71.08,16.382 68.757,16.382 68.8,12.53 59.2,12.53
  pour cut-out: 37.6,13.237 37.6,15.33 42.75,15.33 42.75,9.33 39.45,9.33 39.45,13.33
  pour cut-out: 41.607,31.389 41.607,20.58 51.5,20.58 51.5,31.389
  pour cut-out: 37.85,38.8 37.85,27.43 28,27.43 28,38.8
  pour cut-out: 25.75,37.33 25.75,31.213 25.75,18.825 24.75,18.83 1,18.83 1,37.33
  region net NetC12_2: 25.75,14.98 25.75,17.58 24.847,18.487 24.847,19.33 23,19.33 22.25,18.58 13.75,18.58 13.5,18.329 13.5,14.98
  region net GND: 26.75,16.58 26.75,15.33 28,14.08 30,14.08 31.05,15.13 31.05,16.08 30.55,16.58
  pour cut-out: 48,6.58 67,6.58 67,1.33 48,1.33
  region net 3V3: 13.5,13.58 13.5,9.83 18.25,9.83 19.75,8.33 31,8.33 31,13.58
  pour cut-out: 19,7.812 19.017,7.829 31.9,7.829 31.9,6.25 31.97,6.18 34.35,6.18 34.35,2.302 19,2.302
  pour cut-out: 33,22.735 33.095,22.64 33.095,14.98 25.75,14.98 25.75,22.735
Bottom Layer:
  text "Transfer DSW" at 46.25,49.25 h1.52
  text "1437 InclinometerPCB_V10" at 54.5,47.25 h1.52

## Silkscreen, mask and mechanical layers (free items; w line width, h text height)
Top Overlay:
  lines w0.2: 27.7,38.823 30.177,38.823 30.5,38.5
  lines w0.254: 21.75,23.03 21.75,23.33
Board outline:
  drawing of 213 lines, arcs and shapes, not listed

## Text inside footprints (layer, text, board x,y; h text height)
J3: Top Overlay "1" at 32.318,5.354 h1
J5: Top Overlay "1" at 40.85,36.03 h1.52
J7: Top Overlay "1" at 4.35,36.03 h1.52